# Altium PCB Smart Bike Theft Tracker.PcbDoc
Units mm, origin at the board's own origin, x right, y up, seen from the top; angles counter-clockwise.
Board outline 57.28 x 40.64 mm, 4 copper layers (Layer 1, Layer 2, Layer 3, Layer 4), stack 1.626 mm thick; 43 components, 33 nets, 240 pads, 66 vias.
Unrouted connection lines stored in the file: 1.
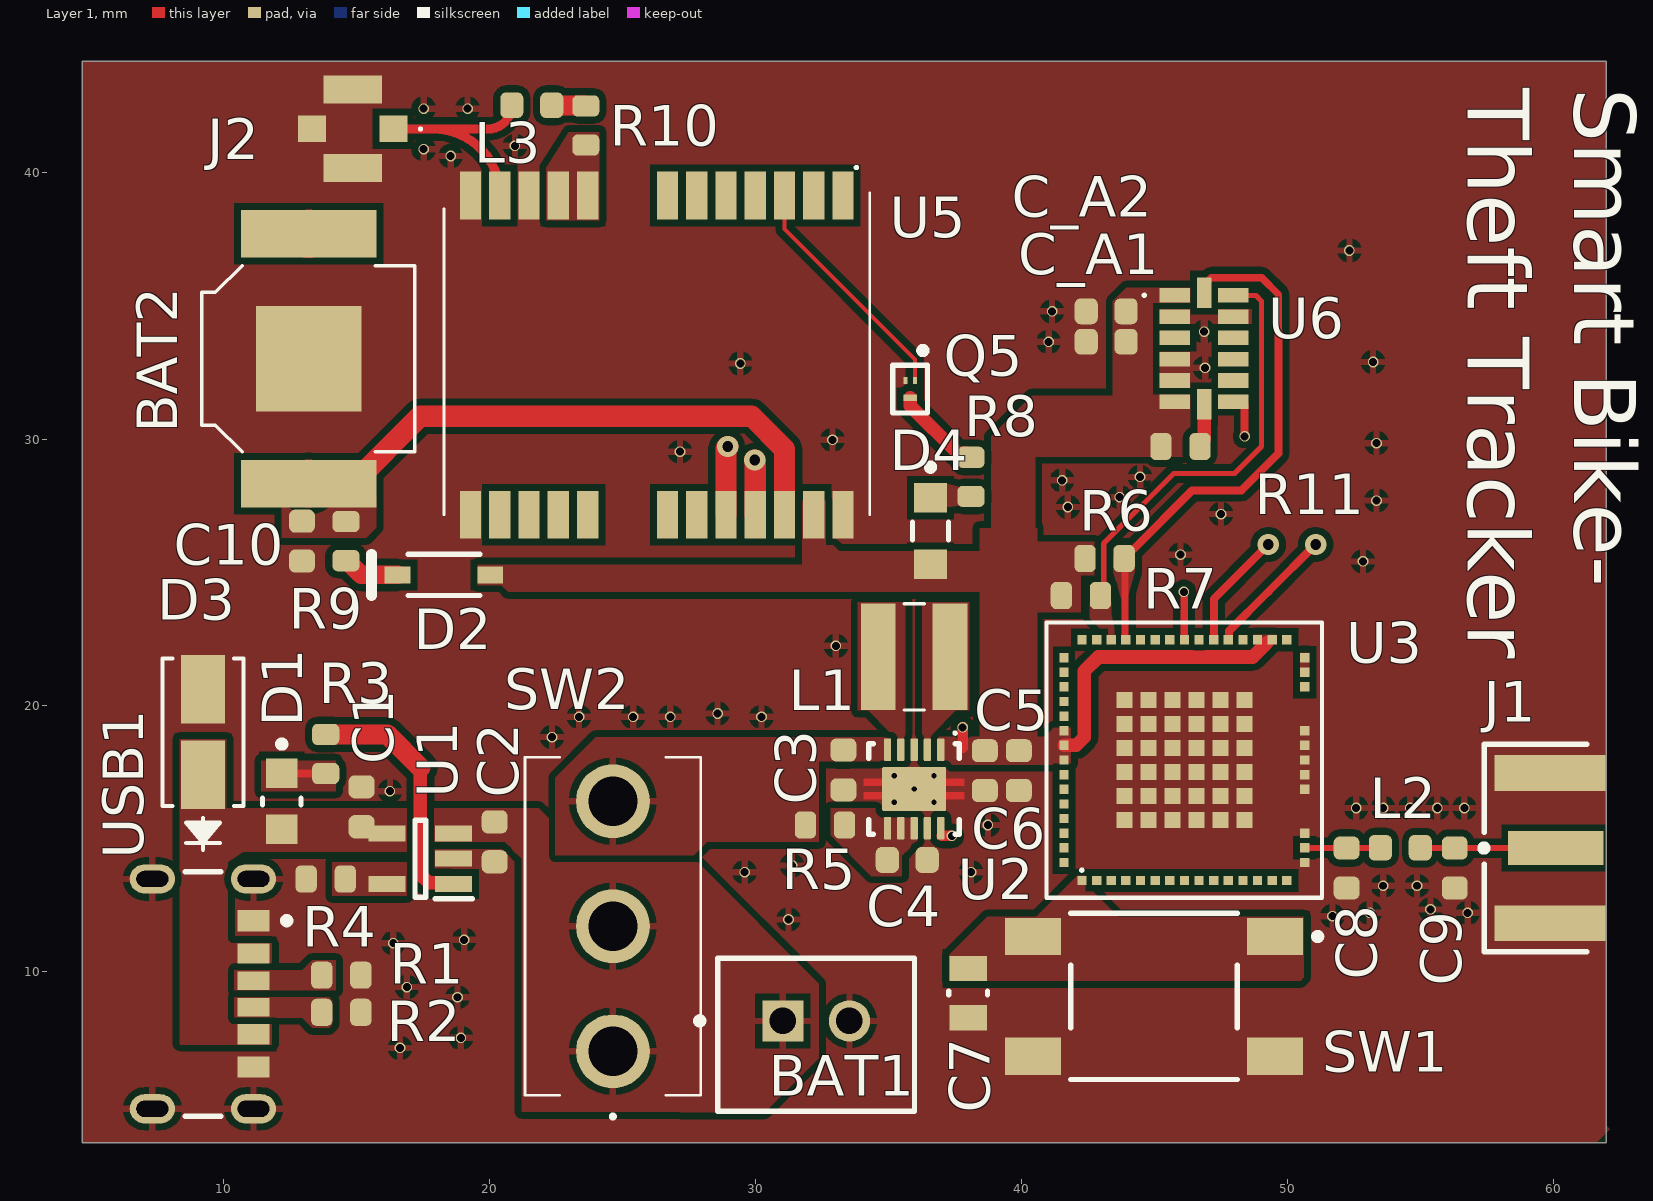
[diagram p0: Layer 1 view]
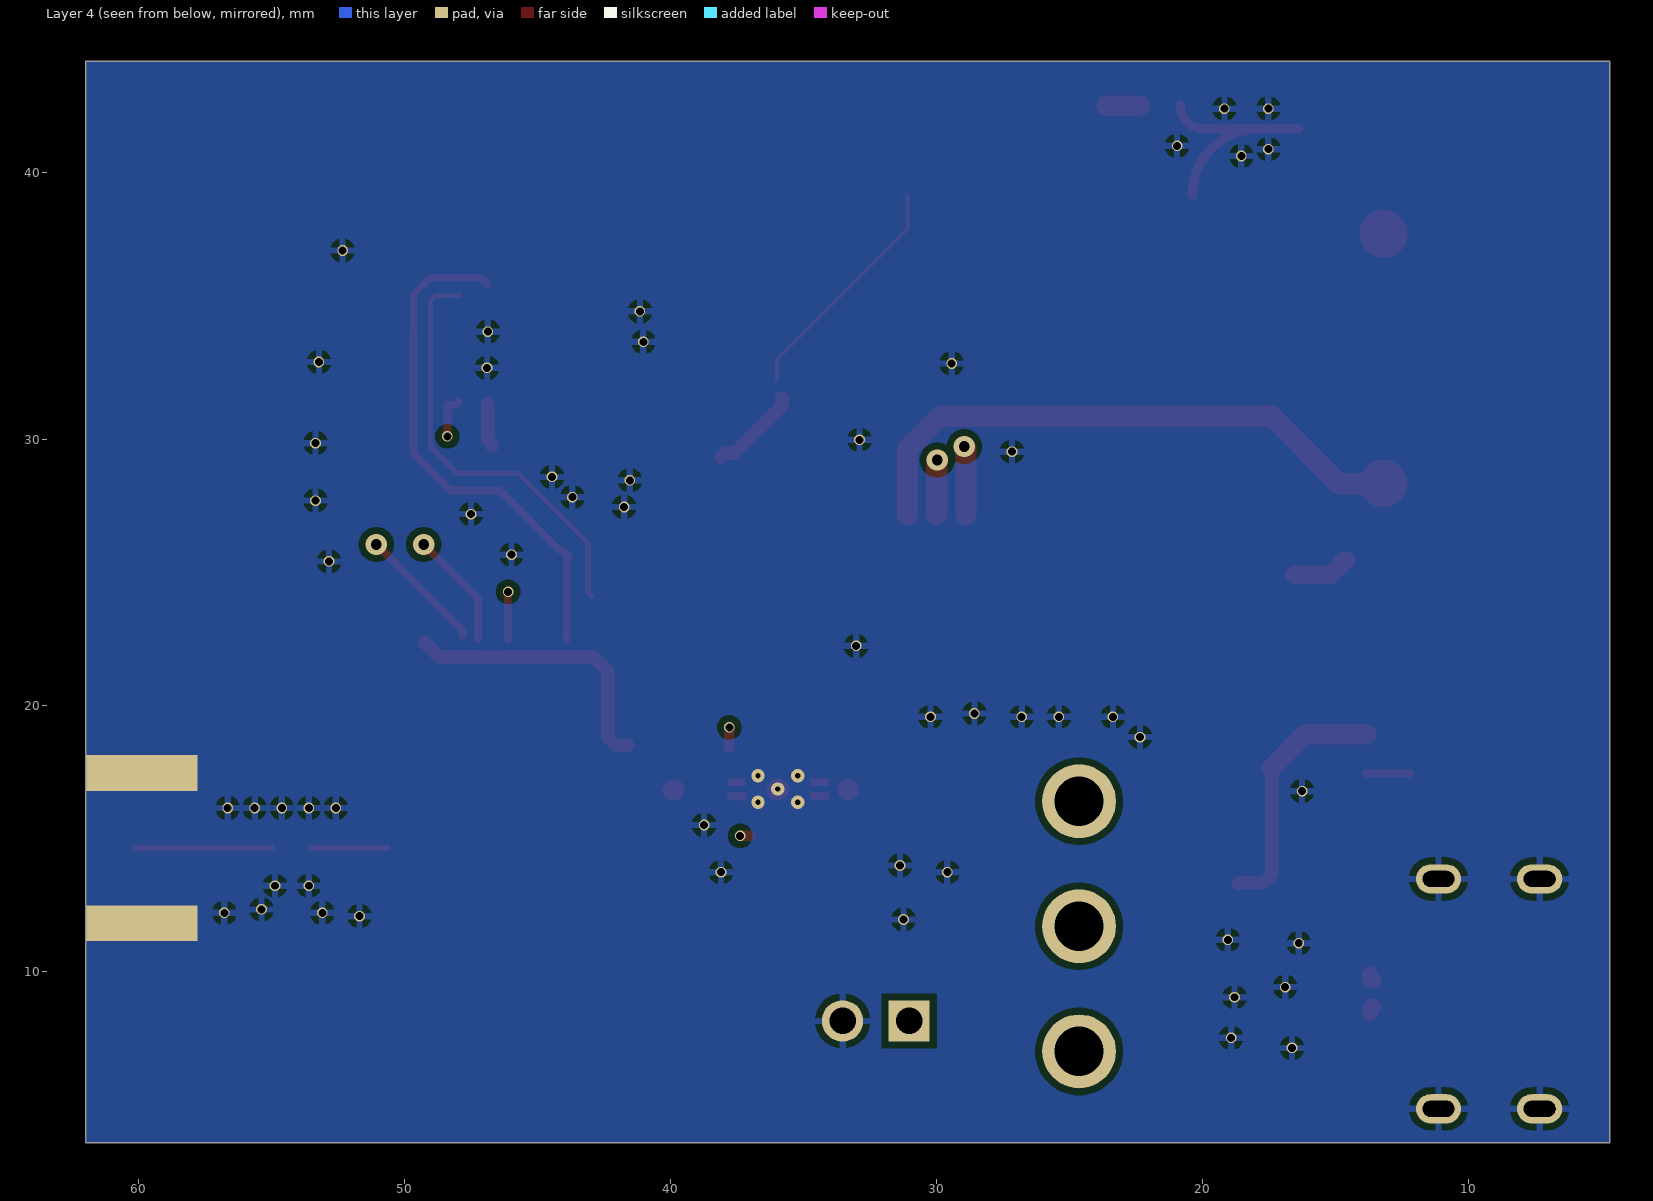
[diagram p1: Layer 4 view, seen from below]
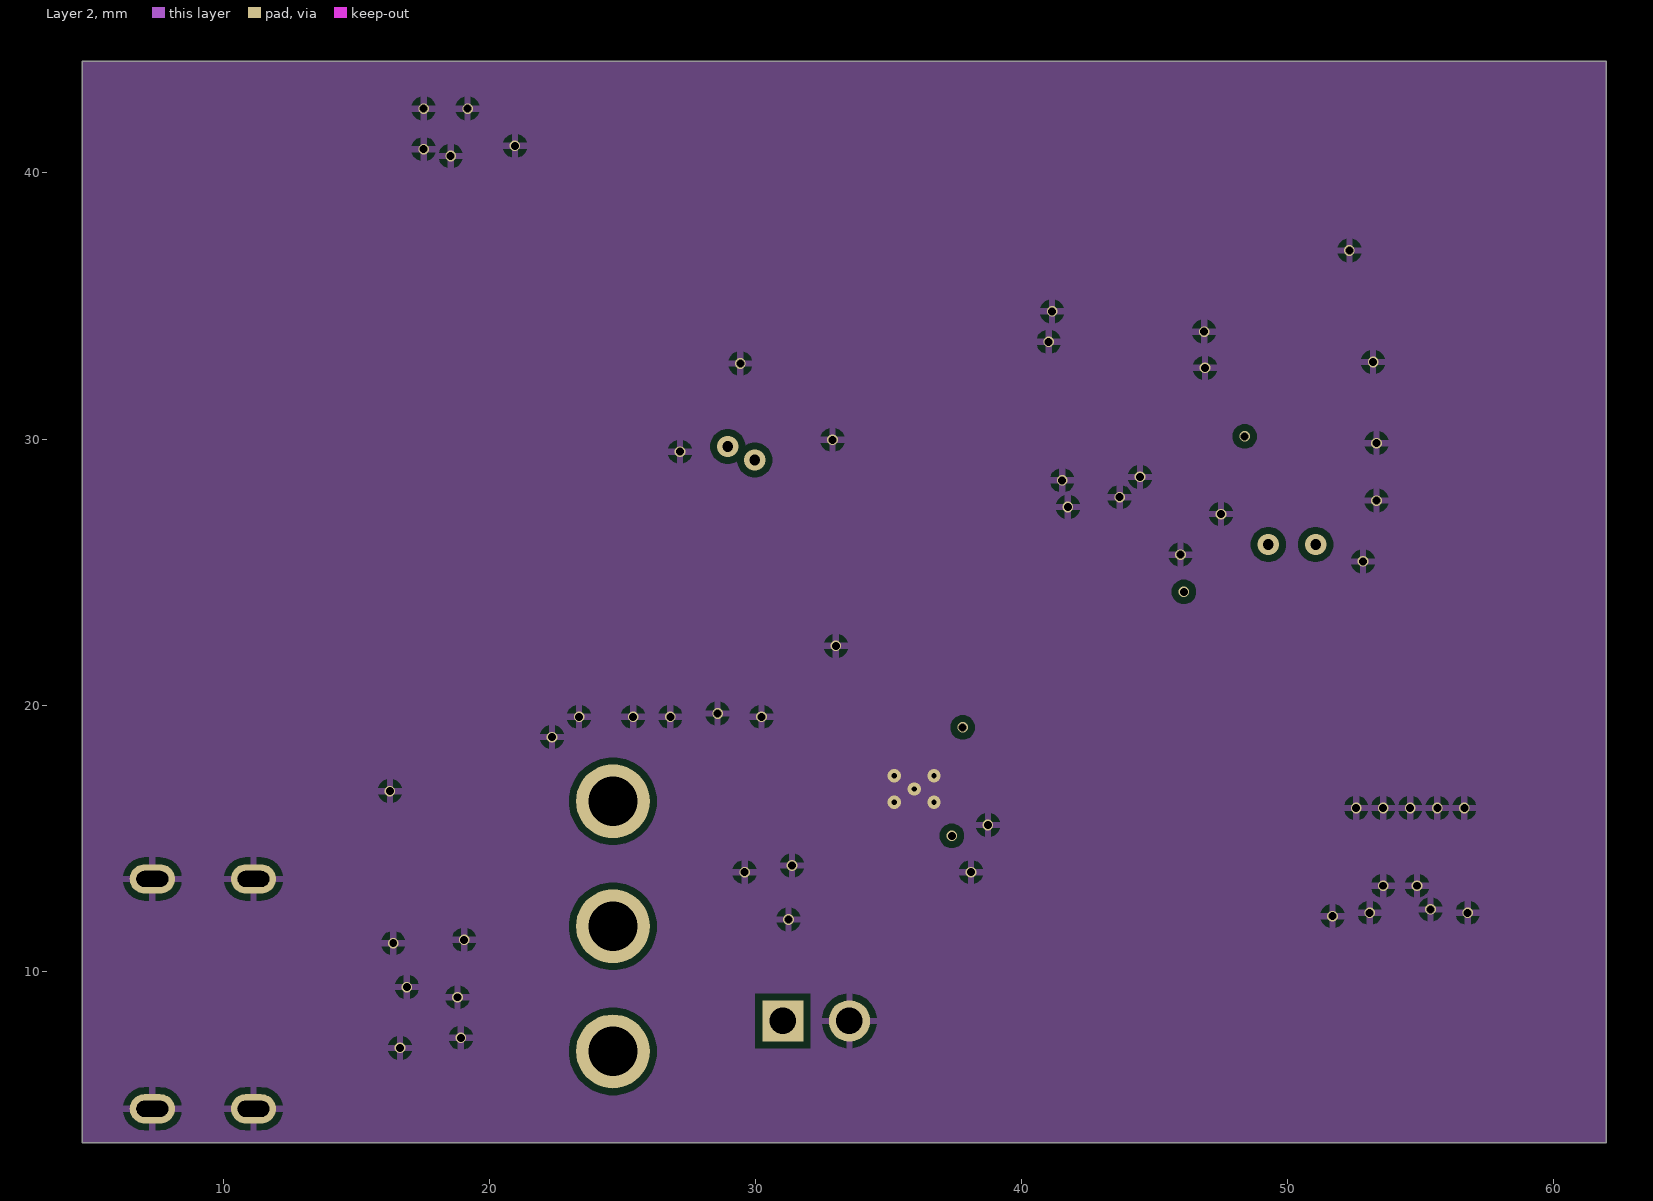
[diagram p2: Layer 2]
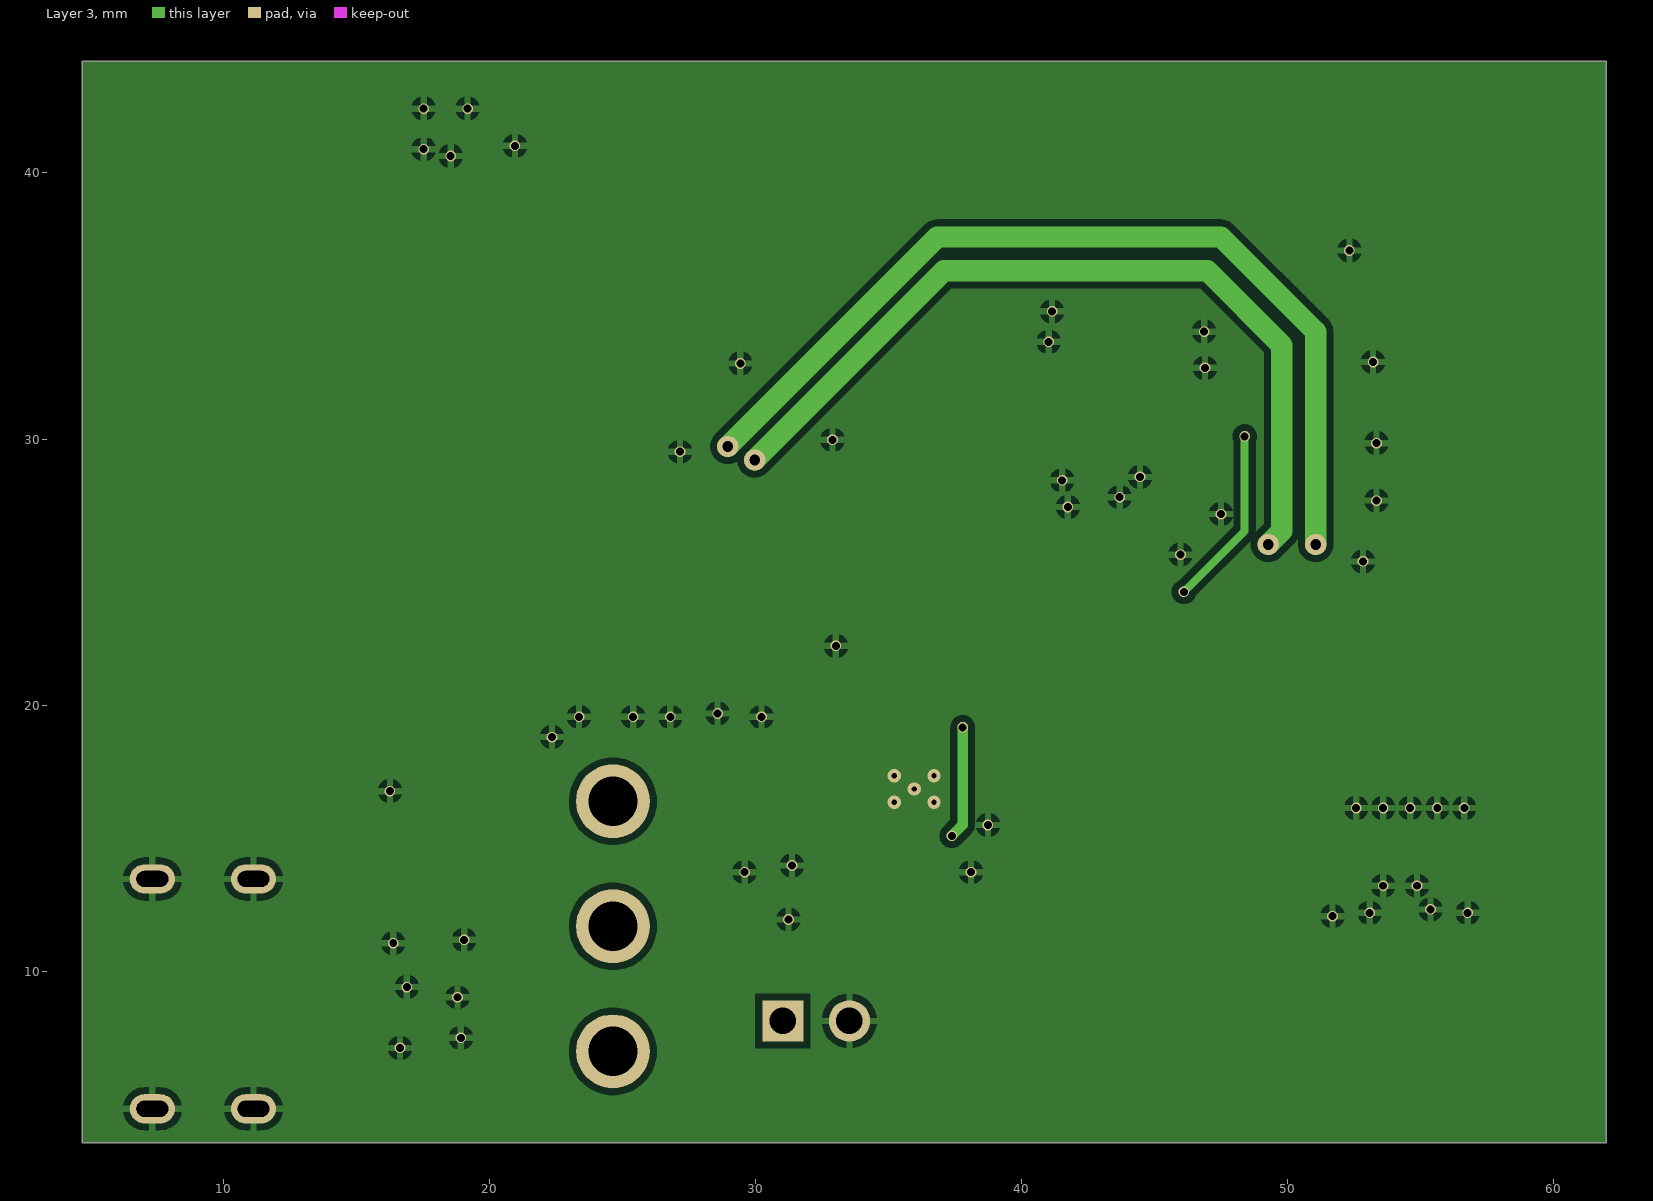
[diagram p3: Layer 3]
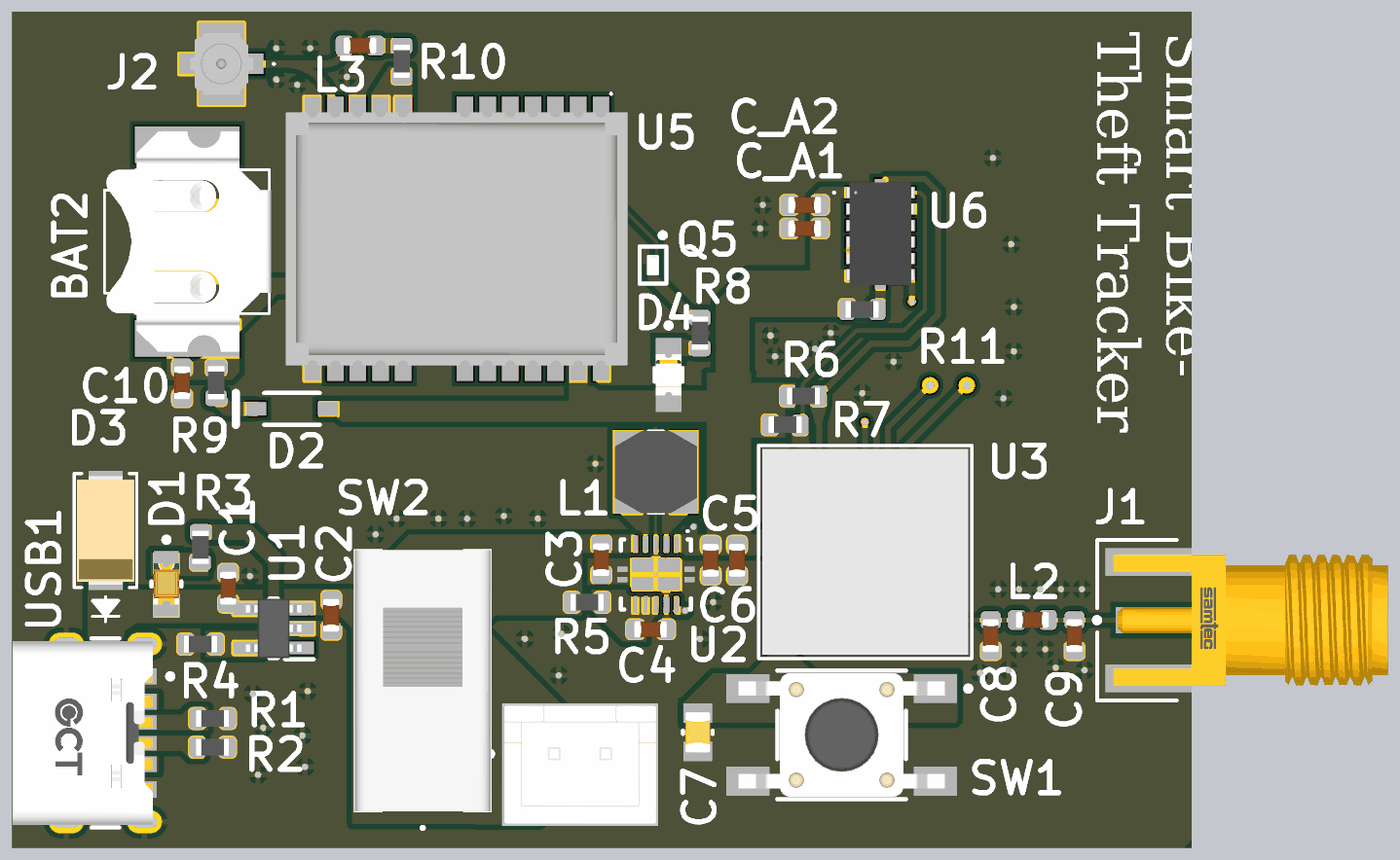
[diagram p4: 3D render of the assembled board from above, using the file's embedded part models]

## Layer stack, top to bottom
Top Solder: solder mask 0.0254, SM-001, Dk 4
Layer 1: signal copper 0.035
Dielectric 1: prepreg 0.2104, PP-017, Dk 4.4
Layer 2: signal copper 0.035
Dielectric 2: core 1.065, Core-039, Dk 4.6
Layer 3: signal copper 0.035
Dielectric 3: prepreg 0.2104, PP-017, Dk 4.4
Layer 4: signal copper 0.035
Bottom Solder: solder mask 0.0254, SM-001, Dk 4

## Board outline
4.699,3.556 61.976,3.556 61.976,44.196 4.699,44.196

## Design rules (kind name [scope] priority, off if disabled: settings)
Clearance [All] p1: gap=0.254 ignorepadtopadclearanceinfootprint=FALSE except(0.2: Arc-SMDPad Track-SMDPad SMDPad-SMDPad)
MinimumSolderMaskSliver [All] p1: minsoldermaskwidth=0.05
PolygonConnect "GND pour" [InNet('GND') vs InNet('GND')] p1: thpad.connectstyle=Relief thpad.reliefconductorwidth=0.254 thpad.reliefentries=4 thpad.polygonreliefangle="90 Angle" thpad.airgapwidth=0.254 smdpad.connectstyle=Direct smdpad.reliefconductorwidth=0.254 smdpad.reliefentries=4 smdpad.polygonreliefangle="90 Angle" smdpad.airgapwidth=0.254 via.connectstyle=Direct via.reliefconductorwidth=0.254 via.reliefentries=4 via.polygonreliefangle="90 Angle" via.airgapwidth=0.254
PolygonConnect [All] p2: thpad.connectstyle=Relief thpad.reliefconductorwidth=0.254 thpad.reliefentries=4 thpad.polygonreliefangle="90 Angle" thpad.airgapwidth=0.254 smdpad.connectstyle=Direct smdpad.reliefconductorwidth=0.254 smdpad.reliefentries=4 smdpad.polygonreliefangle="90 Angle" smdpad.airgapwidth=0.254 via.connectstyle=Direct via.reliefconductorwidth=0.254 via.reliefentries=4 via.polygonreliefangle="90 Angle" via.airgapwidth=0.254
RoutingVias [All] p1: holewidth=0.3 width=0.4 viastyle="Through Hole" minholewidth=0.3 minwidth=0.4 maxholewidth=0.3 maxwidth=0.4
SolderMaskExpansion [All] p1: expansion=0.102 istentingtop=FALSE
SupplyNets "Schematic Supply Nets_1" [InNet('GND')] p1: voltage=0.000
SupplyNets "Schematic Supply Nets" [InNet('GND')] p2: voltage=0.000
SupplyNets "Schematic Supply Nets_4" [InNet('3V3')] p3: voltage=0.000
Width "GPS RF" [InNet('NetJ2_1')] p1: maxlimit=0.348 minlimit=0.254 preferedwidth=0.348 toplayer_minwidth=0.348 midlayer2_prefwidth=0.248 bottomlayer_minwidth=0.348 impedanceprofiledriven=TRUE impedanceprofileid={65077847-5944-4495-BCBA-3C967489DBFF} impedanceprofilevalue=50.000000 minimp=50.000000 maximp=50.000000 favimp=50.000000
Width "LoRa RF" [InNetClass('LoRa RF')] p2: maxlimit=0.231 minlimit=0.231 preferedwidth=0.231 impedanceprofiledriven=TRUE impedanceprofileid={950E5AF8-2604-445B-8C1F-956C5B0C9720} impedanceprofilevalue=50.000000 minimp=50.000000 maximp=50.000000 favimp=50.000000
Width [All] p3: maxlimit=2.54 minlimit=0.15 preferedwidth=0.254 minimp=50.000000 maximp=50.000000 favimp=50.000000
29 further rules are at their usual default settings.

## Classes and differential pairs
net class "LoRa RF": "LoRa ANT" "STM ANT"
component class U_MCU: C7 C8 C9 J1 L2 L? R6 R7 SW1 U3
component class U_GyroSense: C_A1 C_A2 R11 U6
component class U_GPS: BAT2 C10 D2 D4 J2 L3 L? Q5 R8 R9 R10 U5
component class U_BatteryCharger: BAT1 C1 C2 C3 C4 C5 C6 CR? D1 D3 L1 L? R1 R2 R3 R4 R5 SW2 U1 U2 USB1

## Components (designator, comment, footprint, x,y, rotation, side; value= is the part's Value field where it differs from the comment)
BAT1 "B2B-XH-A" JST_B2B-XH-A 32.278,7.603 r0 top
BAT2 "2998" BAT_2998TR 13.208,33.02 r90 top
C1 "4u7" CAP_0603 15.193,16.176 r270 top
C2 "4u7" CAP_0603 20.193,14.859 r90 top
C3 "10u" CAP_0603 33.305,17.562 r90 top
C4 "100n" CAP_0603 35.703,14.178 r180 top
C5 "10u" CAP_0603 38.621,17.537 r90 top
C6 "10u" CAP_0603 39.899,17.537 r90 top
C7 "AC0805KKX7R5BB105" FP-AC0805-0_85-MFG 37.994,9.175 r270 top value="1 uF"
C8 "" CAP_0603 52.218,13.874 r90 top
C9 "" CAP_0603 56.282,13.874 r90 top
C10 "1u" CAP_0603 12.954,26.162 r90 top
C_A1 "0.1 uF" CAP_0603 43.18,33.655 r0 top
C_A2 "10 uF" CAP_0603 43.18,34.798 r0 top
D1 "598-8110-107F" RED_LED_0805 12.192,16.383 r270 top
D2 "STPS0540Z" STM-SOD-123-2_V 18.288,24.892 r180 top
D3 "SMAJ5.0A" SMASeries_LTF-M 9.236,18.981 r90 top
D4 "LTST-C171KGKT" FP-LTST-C171KGKT-MFG 36.576,26.543 r270 top
J1 "SMA-J-P-H-ST-EM1" FP-SMA-J-P-H-ST-EM1-MFG 66.74,14.624 r90 top
J2 "A-1JB" A1JB 14.859,41.656 r0 top
L1 "VLS4012ET-2R2M" IND_VLS4012ET-2R2M 35.962,21.814 r0 top
L2 "0R" CAP_0603 54.238,14.636 r0 top
L3 "LQG18HN27NJ00D" CAP_0603 21.59,42.545 r180 top
Q5 "CSD13381F4" FP-CSD13381F4-MFG 35.814,31.877 r180 top
R1 "5k1" RES_0603 14.429,9.848 r180 top
R2 "5k1" RES_0603 14.429,8.451 r0 top
R3 "140R" RES_0603 13.843,18.161 r270 top
R4 "1k05" RES_0603 13.843,13.462 r180 top
R5 "100R" RES_0603 32.612,15.494 r180 top
R6 "4k7" RES_0603 43.121,25.511 r180 top
R7 "4k7" RES_0603 42.232,24.114 r180 top
R8 "1k" RES_0603 38.1,28.575 r90 top
R9 "3k3" RES_0603 14.605,26.162 r270 top
R10 "22R" RES_0603 23.622,41.783 r90 top
R11 "4.7K" RES_0603 45.974,29.718 r0 top
SW1 "TL3301AF160QG" FP-TL3301AF160QG-MFG 44.979,9.048 r180 top
SW2 "500SSP1S1M2QEA" 500SSP1S1M2QEA 24.638,6.983 r90 top
U1 "MCP73831T-2ACI/OT" SOT95P270X145-5N 17.399,14.224 r180 top
U2 "TPS63001DRCR" DRC0010J_V 35.962,16.844 r270 top
U3 "STM32WL5MOCH6TR" LGA-92_10X10_STM 46.122,17.933 r90 top
U5 "NEO-6M-0-001" NEO6M0001 26.289,33.655 r90 top
U6 "ADXL345BCCZ-RL7" ADXL345BCCZRL7 46.863,33.401 r0 top
USB1 "USB4125-GF-A-0190" FP-USB4125-GF-A-0190-MFG 8.128,9.144 r270 top

## Footprints (in the part's own frame and the unit in brackets; to place one, negate y for a bottom-side part, rotate by r counter-clockwise, add the part's x,y. Pads: shape width x height; smd on the part's side, far side on the other; paste and mask are expansions set on the pad)
500SSP1S1M2QEA [mm]
  round 2.775 hole 1.85: 1(0,0) 2(4.7,0) 3(9.4,0)
  silkscreen extent -2.5,-3.3 11.05,3.3, body extent -1.65,-3.3 11.05,3.3, height 11.43
A1JB [mm]
  rect 1.05x1 smd: 1(1.525,0) 3(-1.525,0)
  rect 2.2x1.05 smd: 2(0,1.475) 4(0,-1.475)
  silkscreen extent 2.5,-0.05 2.6,0.05, body extent -1.55,-1.5 1.55,1.5, height 1.24
ADXL345BCCZRL7 [mm] "Accelerometer"
  rect 1.145x0.55 smd: 1(-1.097,2) 2(-1.097,1.2) 3(-1.097,0.4) 4(-1.097,-0.4) 5(-1.097,-1.2) 6(-1.097,-2) 8(1.098,-2) 9(1.098,-1.2) 10(1.098,-0.4) 11(1.098,0.4) 12(1.098,1.2) 13(1.098,2)
  rect 0.55x1.145 smd: 7(0,-2.098) 14(0,2.098)
  silkscreen extent -2.3,1.95 -2.2,2.05, body extent -1.63,-2.5 1.63,2.5, height 1.02
BAT_2998TR [mm]
  rect 3.96x3.96 smd paste-3: 1(0,0)
  rect 1.78x5.08 smd: 2(-4.7,0) 2(4.7,0)
  silkscreen extent -3.49,-3.98 3.49,4.02, body extent -5.36,-4.06 5.36,3.94, height 3.05
CAP_0603 [mm]
  rrect51% 0.87x0.97 smd mask+0.05: 1(-0.75,0) 2(0.75,0)
  body extent -0.8,-0.4 0.8,0.4, height 0.8
DRC0010J_V [mm] "SON, 10-Leads, Body 3x3mm, Pitch 0.5mm, Thermal Pad 2.4x1.65mm, TI Recommended"
  rrect36% 0.85x0.28 smd paste-0.025 mask+0.07: 1(-1.475,1) 2(-1.475,0.5) 3(-1.475,0) 4(-1.475,-0.5) 5(-1.475,-1) 6(1.475,-1) 7(1.475,-0.5) 8(1.475,0) 9(1.475,0.5) 10(1.475,1)
  rrect6% 1.65x2.4 smd paste-0.825 mask+0.07: 11(0,0)
  Layer 1 region: -0.392,1.2 -0.112,1.2 -0.112,1.9 -0.392,1.9
  Layer 1 region: 0.388,1.9 0.108,1.9 0.108,1.2 0.388,1.2
  Layer 1 region: 0.388,-1.2 0.108,-1.2 0.108,-1.9 0.388,-1.9
  Layer 1 region: -0.392,-1.9 -0.112,-1.9 -0.112,-1.2 -0.392,-1.2
  silkscreen extent -2.15,-1.7 1.7,1.7, body extent -1.55,-1.55 1.55,1.55, height 1
FP-AC0805-0_85-MFG [mm]
  rect 0.95x1.4 smd paste+0 mask+0: 1(-0.925,0) 2(0.925,0)
  silkscreen extent -0.08,-0.72 0.08,0.72, body extent -1.6,-1.05 1.6,1.05, height 0.25
FP-CSD13381F4-MFG [mm]
  rect 0.15x0.25 smd paste+0 mask+0: 1(-0.175,-0.325) 2(0.175,-0.325)
  rect 0.5x0.25 smd paste+0 mask+0: 3(0,0.325)
  silkscreen extent -0.65,-1.57 0.65,0.9, body extent -0.82,-1.02 0.82,1.02, height 0.25
FP-LTST-C171KGKT-MFG [mm]
  rect 1.1x1.25 smd paste+0 mask+0: 1(-1.25,0) 2(1.25,0)
  silkscreen extent -2.52,-0.67 0.33,0.67, body extent -1.9,-0.77 1.9,0.77, height 0.25
FP-SMA-J-P-H-ST-EM1-MFG [mm]
  rect 1.27x3.6 smd paste+0 mask+0: 1(0,6.66)
  rect 1.35x4.2 smd paste+0 mask+0: 2(-2.825,6.86) 3(2.825,6.86)
  rect 1.35x4.2 smd far side paste+0 mask+0: 4(-2.825,6.86) 5(2.825,6.86)
  silkscreen extent -3.9,5.5 3.9,9.48, body extent -3.6,-4.92 3.6,9.06, height 0.25
FP-TL3301AF160QG-MFG [mm]
  rect 2.1x1.4 smd paste+0 mask+0: 1(-4.55,-2.25) 2(4.55,-2.25) 3(-4.55,2.25) 4(4.55,2.25)
  silkscreen extent -6.28,-3.13 3.13,3.13, body extent -5.7,-3.22 5.7,3.22, height 0.25
FP-USB4125-GF-A-0190-MFG [mm]
  rrect100% 1.1x1.7 hole 1.2 slot 0.6 at 0 deg paste-2539.97 mask+0: 1(-4.32,3) 2(4.32,3) 3(-4.32,-0.8) 4(4.32,-0.8)
  rect 0.7x1.2 smd paste+0 mask+0: A5(-0.5,3) B5(0.5,3)
  rect 0.76x1.2 smd paste+0 mask+0: A9(1.52,3) B9(-1.52,3)
  rect 0.8x1.2 smd paste+0 mask+0: A12(2.75,3) B12(-2.75,3)
  silkscreen extent -4.59,0.43 4.59,4.38, body extent -4.97,-3.57 4.97,3.95, height 0.25
IND_VLS4012ET-2R2M [mm]
  rect 1.3x4 smd: 1(-1.35,0) 2(1.35,0)
  silkscreen extent -0.38,-2 0.38,2, body extent -2,-2 2,2, height 1.2
JST_B2B-XH-A [mm]
  rect 1.55x1.55 hole 1 paste-2539.97 mask+0: 1(-1.25,0.525)
  round 1.55 hole 1 paste-2539.97 mask+0: 2(1.25,0.525)
  silkscreen extent -4.5,-2.88 3.7,2.88, body extent -3.8,-2.98 3.8,2.98, height 0.25
LGA-92_10X10_STM [mm]
  rect 0.35x0.35 smd paste+0 mask+0: 1(-4.525,3.85) 2(-4.525,3.3) 3(-4.525,2.75) 4(-4.525,2.2) 5(-4.525,1.65) 6(-4.525,1.1) 7(-4.525,0.55) 8(-4.525,0) 9(-4.525,-0.55) 10(-4.525,-1.1) 11(-4.525,-1.65) 12(-4.525,-2.2) 13(-4.525,-2.75) 14(-4.525,-3.3) 15(-4.525,-3.85) 16(-3.85,-4.525) 17(-3.3,-4.525) 18(-2.75,-4.525) 19(-1.1,-4.525) 20(-0.55,-4.525) 21(0,-4.525) 22(0.55,-4.525) 23(1.1,-4.525) 24(2.75,-4.525) 25(3.3,-4.525) 26(3.85,-4.525) 27(4.525,-3.85) 28(4.525,-3.3) 29(4.525,-2.75) 30(4.525,-2.2) 31(4.525,-1.65) 32(4.525,-1.1) 33(4.525,-0.55) 34(4.525,0) 35(4.525,0.55) 36(4.525,1.1) 37(4.525,1.65) 38(4.525,2.2) 39(4.525,2.75) 40(4.525,3.3) 41(4.525,3.85) 42(3.85,4.525) 43(3.3,4.525) 44(2.75,4.525) 45(2.2,4.525) 46(1.65,4.525) 47(1.1,4.525) 48(0.55,4.525) 49(0,4.525) 50(-0.55,4.525) 51(-1.1,4.525) 52(-1.65,4.525) 53(-2.2,4.525) 54(-2.75,4.525) 55(-3.3,4.525) 56(-3.85,4.525)
  rect 0.6x0.6 smd paste+0 mask+0: 57(-2.25,2.25) 58(-2.25,1.35) 59(-2.25,0.45) 60(-2.25,-0.45) 61(-2.25,-1.35) 62(-2.25,-2.25) 63(-1.35,-2.25) 64(-0.45,-2.25) 65(0.45,-2.25) 66(1.35,-2.25) 67(2.25,-2.25) 68(2.25,-1.35) 69(2.25,-0.45) 70(2.25,0.45) 71(2.25,1.35) 72(2.25,2.25) 73(1.35,2.25) 74(0.45,2.25) 75(-0.45,2.25) 76(-1.35,2.25) 77(-1.35,1.35) 78(-1.35,0.45) 79(-1.35,-0.45) 80(-1.35,-1.35) 81(-0.45,-1.35) 82(0.45,-1.35) 83(1.35,-1.35) 84(1.35,-0.45) 85(1.35,0.45) 86(1.35,1.35) 87(0.45,1.35) 88(-0.45,1.35) 89(-0.45,0.45) 90(-0.45,-0.45) 91(0.45,-0.45) 92(0.45,0.45)
  silkscreen extent -5.18,-5.18 5.18,5.18, body extent -5,-5 5,5, height 1.82
NEO6M0001 [mm]
  rect 1.8x0.8 smd: 1(5.5,-7) 2(5.5,-5.9) 3(5.5,-4.8) 4(5.5,-3.7) 5(5.5,-2.6) 6(5.5,-1.5) 7(5.5,-0.4) 8(5.5,2.6) 9(5.5,3.7) 10(5.5,4.8) 11(5.5,5.9) 12(5.5,7) 13(-6.5,7) 14(-6.5,5.9) 15(-6.5,4.8) 16(-6.5,3.7) 17(-6.5,2.6) 18(-6.5,-0.4) 19(-6.5,-1.5) 20(-6.5,-2.6) 21(-6.5,-3.7) 22(-6.5,-4.8) 23(-6.5,-5.9) 24(-6.5,-7)
  silkscreen extent -6.5,-8 6.6,8, body extent -6.66,-8.3 5.64,8.3, height 2.66
RED_LED_0805 [mm]
  rect 1.1x1.2 smd paste+0 mask+0.05: 1(-1.05,0) 2(1.05,0)
  silkscreen extent -2.27,-0.72 0.13,0.72, body extent -1.7,-0.82 1.7,0.82, height 0.25
RES_0603 [mm]
  rrect50% 0.8x1.02 smd mask+0.05: 1(-0.735,0) 2(0.735,0)
  body extent -0.8,-0.4 0.8,0.4, height 0.55
SMASeries_LTF-M [mil]
  rect 101.34x65 smd paste+0 mask+0: 1(-63.17,0) 2(63.17,0)
  silkscreen extent -174,-60 109,60, body extent -104,-55 104,55, height 92
SOT95P270X145-5N [mm]
  rect 1.4x0.6 smd: 1(-1.25,0.95) 2(-1.25,0) 3(-1.25,-0.95) 4(1.25,-0.95) 5(1.25,0.95)
  silkscreen extent -1.95,-1.45 0.2,1.5, body extent -1.35,-1.45 1.35,1.45, height 1.45
STM-SOD-123-2_V [mm] "SOP, 2-Leads, Body 2.7x1.55mm"
  rect 0.97x0.65 smd: 1(-1.74,0) 2(1.74,0)
  silkscreen extent -1.35,-0.77 2.72,0.77, body extent -1.37,-0.77 1.37,0.77, height 1.45

## Part data
BAT1: Package=None, Availability=Unavailable, MF="{'manufacturer': u'JST Sales America Inc.'}", MP=B2B-XH-A, Price=None
BAT2: "BATTERY RETAINER COIN 6.8MM SMD", Case/Package=SMD/SMT, Color=Silver, Package Quantity=100, Contact Material=Bronze, Height=2.9mm, Lead Free="Lead Free", Material=Bronze, Mount="Surface Mount", Number of Batteries=1, Number of Cells=1, REACH SVHC="No SVHC", Termination=SMD/SMT
C1 C2 C3 C4 C5 C6 C8 C9: library part CAP_0603, "Capacitor SMD 0603 / Ceramic"
C7: library part CMP-03422-000426-1, "AC0805 1 uF X7R 10.00% 6.3 V", Capacitance="1 uF", Manufacturer=Yageo, Package=AC0805-0.85, Temperature="-55°C to +125°C", Temperature Characteristic=X7R, Temperature Coefficient=15%, Temperature Range High=+125°C, Temperature Range Low=-55°C, Tolerance=0.1, Voltage Rating="6.3 V", Automotive=Yes, Automotive Grade="Grade 1", Category=Cap, ComponentLink2Description=Datasheet, ComponentLink2URL=http://www.yageo.com/documents/recent/UPY-AC_NP0X7R_16V-to-630V_12.pdf, Device Class L1="Passive Components", Device Class L2=Capacitors, Device Class L3="Ceramic Capacitors", Footprint Url=http://www.yageo.com/exep/pages/download/literatures/UPY-C_GEN_24.pdf, Height=0.95mm, Ipc Land Pattern Name=CAPC200125X85, Lead Free=Yes, Manufacturer Part Number=AC0805KKX7R5BB105, Material=Ceramic, Octopart=https://octopart.com/ac0805kkx7r5bb105-yageo-78873385, RoHS=TRUE
C10: library part CAP_0603, "Ceramic Capacitor SMD 0603"
C_A1 C_A2: library part CAP_0603, "Capacitor SMD 0603"
D1: library part RED_LED_0805, "598-8110-107F 598-8110-107F, Dialight, SMD LED 0805 Package, Red Single color SOLD IN INCREMENTS OF 4000. (REEL)", Case Code (Imperial)=0805, Case Code (Metric)=2012, Color=Red, Forward Current=20mA, Forward Voltage=2.2V, Max Junction Temperature (Tj)=105°C, Max Operating Temperature=85°C, Min Operating Temperature=-30°C, Power Dissipation=60mW, Reverse Voltage=5V, Case/Package=0805, Depth=1.25mm, Dominant Wavelength=635nm, Height=800µm, Illumination Color=Red, Lead Free="Lead Free", Length=2mm, Lens Style=Clear, Luminous Intensity=40mcd, Mount="Surface Mount", NexarPartId=868569, Number of Elements=1, Number of LEDs=1, Number of Pins=2, Radiation Hardening=No, REACH SVHC="No SVHC", RoHS=Compliant, Schedule B="8541402000, 8541402000|8541402000, 8541402000|8541402000|8541402000, 8541402000|8541402000|8541402000|8541402000", Test Current=20mA, Viewing Angle=140°, Wavelength=635nm, Width=1.25mm
D2: library part CMP-2000-07170-1, "Schottky Rectifier, 0.5 A, 40 V, 2-Pin SOP (SOD-123), RoHS, Tape and Reel", Diode Case Style=SOD-123, Forward Current If(AV)=500mA, Forward Surge Current Ifsm Max=5.5A, Forward Voltage VF Max=500mV, Manufacturer=STMicroelectronics, Operating Temperature Max=150°C, Package Description="2-Pin Small Outline Diode, Body 2.7 x 1.55 mm", Package Reference=SOD-123-2, Repetitive Reverse Voltage Vrrm Max=40V, Datasheet URL=http://www.st.com/content/ccc/resource/technical/document/datasheet/group1/0f/03/9b/7c/50/58/48/d7/CD00001852/files/CD00001852.pdf/jcr:content/translations/en.CD00001852.pdf, Datasheet Version=01/2002, Diode Configuration=Single, Diode Type=Schottky, Manufacturer URL=http://www.st.com/, Mounting Technology=SurfaceMount, No. of Pins=2Pins, Packaging=CutTape, Product Range=-, SVHC=NoSVHC(15-Jun-2015)
D3: "ESD Protection Diode", Manufacturer_Name="Littelfuse Inc", Copyright="Copyright (C) 2025 Ultra Librarian. All rights reserved.", Manufacturer_Part_Number=SMAJ5.0A
D4: library part CMP-22017-000037-1, "LED GREEN CLEAR SMD", Case Code (Imperial)=0805, Case Code (Metric)=2012, Color=Green, Forward Current=30mA, Forward Voltage=2.4V, Lens Color=Colorless, Max Operating Temperature=85°C, Min Operating Temperature=-55°C, Package Quantity=1, Power Dissipation=75mW, Reverse Voltage=5V, Test Current=20mA, Case/Package=0805, Depth=1.25mm, Dominant Wavelength=571nm, Height=0.8mm, Illumination Color=Green, Lead Free="Lead Free", Length=2mm, Lens Style=Rectangular, Lens Transparency=Clear, Luminous Intensity=35mcd, Mount="Surface Mount", Number of Elements=1, Number of LEDs=1, Number of Pins=2, Packaging="Tape and Reel", Power Rating=75mW, Radiation Hardening=No, Viewing Angle=130°, Wavelength=574nm, Width=1.25mm
J1: library part "LoRa antenna connector", "CONN SMA JACK STR 50OHM EDGE MNT / Use the ANT-SS900", Case/Package=SMA, Dielectric Material=PTFE, Housing Color=Gold, Max Frequency=6GHz, Max Operating Temperature=125°C, Min Operating Temperature=-65°C, Package Quantity=1, Voltage Rating=335V, Body Material=Brass, Body Plating=Gold, Center Contact Plating=Gold, Connector Type=SMA, Contact Material=Copper, Contact Plating=Gold, Depth=13.33mm, Fastening Type=Threaded, Impedance=50R, Insulation Material=Polytetrafluoroethylene, Length=6.35mm, Mount=Edge, Orientation=Straight, Packaging=Tray, Radiation Hardening=No, RoHS Compliant=Yes, Series=SMA, Termination=Solder
J2: "U.FL (UMCC), AMC Connector Jack, Male Pin 50 Ohms Surface Mount Solder", Manufacturer_Name="Amphenol RF", Mouser Part Number=523-A-1JB, Arrow Part Number=A-1JB, Arrow Price/Stock=https://www.arrow.com/en/products/a-1jb/amphenol-rf?utm_currency=USD&region=europe, Datasheet Link=https://s3-us-west-2.amazonaws.com/catsy.582/ca-1jb.pdf, Geometry.Height=1.35mm, Manufacturer_Part_Number=A-1JB, Mouser Price/Stock=https://www.mouser.co.uk/ProductDetail/Amphenol-RF/A-1JB?qs=ncxkyCpAYDBidtvTkuzl1Q%3D%3D
L1: "INDUCTOR, 2.2UH, 2.2A, 20%, SMD; Product Range:TDK - VLS-E Series; Inductance:2.2ÂµH; Inductance Tolerance:Â± 20%; Inductor Construction:Shielded; DC Resistance Max:0.081ohm; RMS Current (Irms):2.2A; Saturation Current (Isat):1.9A; Case Dimensions:4mm x 4mm x 1.2mm; SVHC:No SVHC (20-Jun-2013)", Package="NON STANDARD-2 TDK", Availability="In Stock", Check_prices=https://www.snapeda.com/parts/VLS4012ET-2R2M/TDK/view-part/?ref=eda, MF=TDK, MP=VLS4012ET-2R2M, Price=None, Purchase-URL=https://pricing.snapeda.com/search/part/VLS4012ET-2R2M/?ref=eda, SnapEDA_Link=https://www.snapeda.com/parts/VLS4012ET-2R2M/TDK/view-part/?ref=snap
L2: library part Inductor, "Not necessary. Place 0 ohm resistor", Package=None, Availability=Unavailable, MP=LQG18HN27NJ00D, Price=None
L3: "Ind RF Chip Multi-Layer 27nH 5% 100MHz 12Q-Factor Air 300mA 0603 Paper T/R", Package=None, Availability=Unavailable, MP=LQG18HN27NJ00D, Price=None
Q5: library part CMP-04962-000059-1, "MOSFET N-CH 12V 2.1A 3PICOSTAR", Case/Package=QFN, Continuous Drain Current (ID)=2.1A, Drain to Source Breakdown Voltage=12V, Drain to Source Resistance=180mR, Gate to Source Voltage (Vgs)=8V, Input Capacitance=200pF, Max Operating Temperature=150°C, Max Power Dissipation=500mW, Min Operating Temperature=-55°C, Package Quantity=3000, Drain to Source Voltage (Vdss)=12V, Element Configuration=Single, Fall Time=3.8ns, Lead Free="Lead Free", Mount="Surface Mount", Number of Channels=1, Number of Elements=1, Number of Pins=3, Packaging="Tape and Reel", Power Dissipation=500mW, Rds On Max=180mR, Rise Time=1.5ns, RoHS Compliant=Yes, Turn-Off Delay Time=11ns, Turn-On Delay Time=3.7ns
R1 R2 R3 R4 R5 R6 R7 R8 R9 R10 R11: library part RES_0603, "Resistor SMD 0603"
SW1: library part CMP-17879-000012-1, "SWITCH TACTILE SPST-NO 0.05A 12V", Contact Resistance=100mR, Current Rating=50mA, Insulation Resistance=100MR, Max Operating Temperature=70°C, Max Voltage Rating (DC)=50V, Min Operating Temperature=-20°C, Operating Force=160gf, Package Quantity=1000, Voltage Rating (DC)=12V, Actuator Length=1.4mm, Actuator Material=Nylon, Actuator Type=Standard, Contact Material=Silver, Contact Plating=Silver, Electrical Life=100000Cycles, Illumination Type=Non-Illuminated, Lead Free="Lead Free", Mechanical Life=100000Cycles, Mount="Surface Mount", Orientation=Straight, Packaging="Tape and Reel", REACH SVHC="No SVHC", RoHS Compliant=Yes, Series=TL3301, Switch Function=Off-Mom, Switch Travel=0.25mm, Termination="Gull Wing", Throw Configuration=SPST, Voltage Rating=50V
SW2: "SLIDE, 5A, 120VAC/28VDC SPDT, On-On Through Hole", Manufacturer_Name=E-Switch, Mouser Part Number=612-500-A121, Datasheet Link=https://configured-product-images.s3.amazonaws.com/2D/specs/500SSP1S1M2QEA.pdf, Geometry.Height=11.43mm, Manufacturer_Part_Number=500SSP1S1M2QEA, Mouser Price/Stock=https://www.mouser.co.uk/ProductDetail/E-Switch/500SSP1S1M2QEA?qs=rR7wk9eDIwofjM3j2mZRnA%3D%3D
U1: "Li-Ion Charge Controller 4.2V SOT23-5", Manufacturer_Name=Microchip, Mouser Part Number=579-MCP73831T-2ACIOT, Datasheet Link=http://ww1.microchip.com/downloads/en/DeviceDoc/20001984g.pdf, Geometry.Height=1.45mm, Manufacturer_Part_Number=MCP73831T-2ACI/OT, Mouser Price/Stock=https://www.mouser.co.uk/ProductDetail/Microchip-Technology/MCP73831T-2ACI-OT?qs=yUQqVecv4qvbBQBGbHx0Mw%3D%3D
U2: library part CMP-0345-00006-2, "Buck-Boost Voltage Converter with 1.8 to 5.5 V Input and 3.3 V Output, -40 to 85 degC, 10-Pin SON (DRC), Green (RoHS & no Sb/Br)", Dynamic Voltage Scaling=TRUE, Manufacturer="Texas Instruments", Switching Frequency(Max)(kHz)=1500, ComponentLink1Description=Datasheet, ComponentLink1URL=http://www.ti.com/general/docs/lit/getliterature.tsp?genericPartNumber=TPS63001&fileType=pdf, ComponentLink2Description="Package Specification", ComponentLink2URL=http://www.ti.com/litv/pdf/mpds117k, DatasheetVersion=SLVS520B, Eco-Plan="Green (RoHS & no Sb/Br)", Iout(Max)(A)=1.2, Iq(Typ)(mA)=0.03, Mounting Technology="Surface Mount", PackageDescription="10-Pin Plastic Small Outline No-Lead, 3 x 3 x 1 mm Body, 0.5 mm Pitch, Exposed Pad", PackageReference=DRC0010J, PackageVersion="revL, Sep-2011", PartNumber=TPS63001DRCR, Preset Vout(V)=3.3, Regulated Outputs(#)=1, SubFamily="Buck-Boost Regulator", Synchronous Rectification=TRUE, Topology=Buck-Boost, Vin(Max)(V)=5.5, Vin(Min)(V)=1.8, Vout(Max)(V)=3.3, Vout(Min)(V)=3.3
U3: "Multiprotocol LPWAN dual-core module 32-bit Arm Cortex-M4/M0+ LoRa,(G)FSK, (G)MSK, BPSK", Manufacturer_Name=STMicroelectronics, Copyright="Copyright (C) 2026 Ultra Librarian. All rights reserved.", Datasheet=https://www.st.com/resource/en/datasheet/stm32wl5moc.pdf, Manufacturer_Part_Number=STM32WL5MOCH6TR, RefDes=RefDes, Type=Type
U5: "GPS Module", Manufacturer_Name=u-blox, Datasheet Link=https://www.u-blox.com/sites/default/files/products/documents/NEO-6_DataSheet_%28GPS.G6-HW-09005%29.pdf, Geometry.Height=2.6mm, Manufacturer_Part_Number=NEO-6M-0-001
U6: "ADXL345BCCZ-RL7 Analog Devices, 3-Axis Accelerometer, I2C, SPI, 14-Pin LGA 0.3 V to +3.9 V 40C to +105C", Manufacturer_Name="Analog Devices", Mouser Part Number=584-ADXL345BCCZ-R7, Arrow Part Number=ADXL345BCCZ-RL7, Arrow Price/Stock=https://www.arrow.com/en/products/adxl345bccz-rl7/analog-devices?utm_currency=USD&region=nac, Datasheet Link=https://www.analog.com/media/en/technical-documentation/data-sheets/adxl345.pdf, Geometry.Height=1mm, Manufacturer_Part_Number=ADXL345BCCZ-RL7, Mouser Price/Stock=https://www.mouser.co.uk/ProductDetail/Analog-Devices/ADXL345BCCZ-RL7?qs=WIvQP4zGaninp9Gc%252BCsJzQ%3D%3D
USB1: library part "USB type-C", "CONN RCPT TYPE C 6P SMD RA"

## Via types
v1: diameter 0.4, hole 0.3, Layer 1 to Layer 4, tented both sides, 55 vias
v2: diameter 0.5, hole 0.2, Layer 1 to Layer 4, 5 vias
v3: diameter 0.8, hole 0.4, Layer 1 to Layer 4, 4 vias
v4: diameter 0.4, hole 0.3, Layer 1 to Layer 4, 2 vias

## Nets (pads, with @x,y where several pads share a name; then routed paths per layer and width w, separated by ;. In a path a pad name is that pad's centre, name@x,y a point inside that pad or via, vN(x,y) a via of type N, cw(c..) or ccw(c..) an arc to the next point about the centre after c; other vN are vias at no path point)
3V3: C5.2 C6.2 C_A1.2 C_A2.2 D2.1 D4.2 R6.2 R7.2 R11.1 U2.1 U2.10 U3.28 U3.29 U3.47 U3.48 U3.49 U5.23 U6.1 U6.6 | length 16.1
  Layer 1 w0.4: U2.10@37.002,15.085 v1(37.377,15.085) ; 37.787,18.399 v1(37.787,19.161)
  Layer 1 w0.508: U3.48@41.597,18.488 42.061,18.488 42.359,18.786 42.359,21.277 42.888,21.807 46.393,21.807 46.399,21.8 46.944,21.8 46.95,21.807 48.687,21.807 49.217,22.336
  Layer 3 w0.4: v1(37.377,15.085) 37.787,15.495 v1(37.787,19.161)
+5V: C1.2 D1.2 D3.1 U1.4 USB1.A9 USB1.B9
ACCEL_INT: U3.34 U6.8 | length 10.3
  Layer 1 w0.28: v4(46.101,24.257) 46.111,24.247 46.111,22.469 U3.34
  Layer 1 w0.3: U6.8 48.086,31.276 48.387,31.276 v4(48.387,30.099)
  Layer 3 w0.3: v4(46.101,24.257) 48.387,26.543 v4(48.387,30.099)
CC1: R1.2 USB1.A5 | length 0.2
  Layer 1 w0.635: R1.2@13.6,9.644 13.694,9.738 R1.2
CC2: R2.1 USB1.B5 | length 0.2
  Layer 1 w0.635: R2.1@13.611,8.644 13.694,8.561 R2.1
GND: BAT1.2 BAT2.1 C1.1 C2.1 C3.1 C4.1 C5.1 C6.1 C7.2 C8.1 C9.1 C10.1 C_A1.1 C_A2.1 D3.2 J1.2 J1.3 J1.4 J1.5 J2.2 J2.3 J2.4 Q5.2 R1.1 R2.2 R4.2 SW1.3 SW1.4 U1.2 U2.3 U2.9 U2.11 U3.16 U3.18 U3.19 U3.20 U3.21 U3.22 U3.23 U3.57 U3.58 U3.59 U3.60 U3.61 U3.62 U3.63 U3.64 U3.65 U3.66 U3.67 U3.68 U3.69 U3.70 U3.71 U3.72 U3.73 U3.74 U3.75 U3.76 U3.77 U3.78 U3.79 U3.80 U3.81 U3.82 U3.83 U3.84 U3.85 U3.86 U3.87 U3.88 U3.89 U3.90 U3.91 U3.92 U5.10 U5.12 U5.13 U5.24 U6.2 U6.4 U6.5 U6.12 USB1.1 USB1.2 USB1.3 USB1.4 USB1.A12 USB1.B12 | length 0.1
  Layer 1 w0.8: C3.1 C3.1@33.321,16.828 ; U2.11@35.946,16.828 v2(35.962,16.844) U2.11@35.99,16.816 ; C6.1@39.87,16.816 C6.1
  other v1: 16.637,7.112 18.923,7.493 18.796,9.017 16.891,9.398 16.383,11.049 19.05,11.176 31.242,11.938 51.689,12.065 53.086,12.192 56.769,12.192 55.372,12.319 53.594,13.208 54.864,13.208 29.591,13.716 38.1,13.716 31.369,13.97 38.735,15.494 52.578,16.129 53.594,16.129 54.61,16.129 55.626,16.129 56.642,16.129 16.256,16.764 22.352,18.796 23.368,19.558 25.4,19.558 26.797,19.558 30.226,19.558 28.575,19.685 33.02,22.225 52.832,25.4 45.974,25.654 47.498,27.178 41.741,27.445 53.34,27.686 43.688,27.813 41.529,28.448 44.45,28.575 27.161,29.522 53.34,29.845 32.893,29.972 46.896,32.675 29.429,32.836 53.213,32.893 41.021,33.655 46.863,34.036 41.148,34.798 52.324,37.084 18.542,40.64 17.526,40.894 20.955,41.021 17.526,42.418 19.177,42.418
  other v2: 35.212,16.344 36.712,16.344 35.212,17.344 36.712,17.344
GSCL: U5.19
GSDA: U5.18
I2C_SCL: R6.1 U3.38 U6.14 | length 19.7
  Layer 1 w0.279: R6.1 43.889,25.478 43.889,22.491 U3.38 ; U6.14@46.863,35.796 47.135,36.068 49.022,36.068 49.657,35.433 49.657,34.046
  Layer 1 w0.3: R6.1 43.856,25.594 44.102,25.84 44.185,25.84 46.411,28.067 48.26,28.067 49.657,29.464 49.657,34.046
I2C_SDA: R7.1 U3.39 U6.13 | length 16.1
  Layer 1 w0.2: R7.1 43.086,24.233 43.086,26.068 45.72,28.702 48.006,28.702 49.022,29.718 49.022,35.179 48.808,35.393 47.969,35.393 U6.13
"LoRa ANT": C9.2 J1.1 L2.2 | length 5.1
  Layer 1 w0.231: L2.2 54.994,14.63 56.276,14.63 C9.2 J1.1
NetD1_1: D1.1 R3.2 | length 1.7
  Layer 1 w0.305: D1.1 12.199,17.426 R3.2
NetD2_2: D2.2 R9.2 | length 2.2
  Layer 1 w0.7: R9.2 14.715,25.427 14.765,25.377 14.765,25.302 15.175,24.892 D2.2
NetD4_1: D4.1 R8.1
NetJ2_1: J2.1 L3.2 U5.11 | length 8.9
  Layer 1 w0.348: J2.1 17.888,41.656 ; U5.11 ccw(c17.888,39.155) 17.888,41.656 ; L3.2 cw(c19.951,42.545) 19.951,41.656 17.888,41.656
NetL1_1: L1.1 U2.4
NetL1_2: L1.2 U2.2
NetL3_1: L3.1 R10.2 | length 1.3
  Layer 1 w0.75: L3.1 23.595,42.545 R10.2
NetQ5_3: Q5.3 R8.2 | length 3.4
  Layer 1 w0.5: Q5.3 35.814,31.242 37.596,29.46 37.95,29.46 R8.2
NetR10_1: R10.1 U5.8 U5.9
NetR11_2: R11.2 U6.7 | length 1.6
  Layer 1 w0.5: R11.2 46.709,29.828 46.863,29.982 U6.7
PPS: Q5.1 U5.3 | length 9
  Layer 1 w0.15: U5.3 31.089,37.891 35.989,32.991 Q5.1
PROG: R4.1 U1.5
RX: U3.31 U5.20 | length 42.2
  Layer 1 w0.3: U3.31@47.797,22.606 47.797,22.778 49.276,24.258 v3(51.054,26.035)
  Layer 1 w0.8: U5.20 28.889,29.651 v3(28.956,29.718)
  Layer 3 w0.8: v3(28.956,29.718) 36.83,37.592 47.498,37.592 51.054,34.036 v3(51.054,26.035)
SMPS: C3.2 R5.2 SW2.3 U2.5
STAT: R3.1 U1.1 | length 9.5
  Layer 1 w0.508: 17.399,17.653 17.399,13.633 17.712,13.32 18.603,13.32 U1.1
  Layer 1 w0.762: R3.1 16.156,18.896 17.399,17.653
"STM ANT": C8.2 L2.1 U3.17 | length 2.9
  Layer 1 w0.231: U3.17@50.647,14.638 50.654,14.631 52.211,14.631 C8.2 52.224,14.63 53.482,14.63 L2.1
"STM NRST": C7.1 SW1.1 SW1.2 U3.1
TX: U3.32 U5.21 | length 38.1
  Layer 1 w0.3: U3.32@47.226,22.479 47.226,23.985 v3(49.276,26.035)
  Layer 1 w0.8: v3(29.972,29.21) 29.989,29.193 U5.21
  Layer 3 w0.8: v3(29.972,29.21) 37.084,36.322 46.99,36.322 49.784,33.528 49.784,26.543 v3(49.276,26.035)
V_BCKP: BAT2.2 C10.2 R9.1 U5.22 | length 21.9
  Layer 1 w0.8: BAT2.2@13.208,28.32 14.858,28.32 17.399,30.861 29.845,30.861 31.089,29.617 U5.22
  Layer 1 w1.8: BAT2.2@13.198,28.33 BAT2.2@13.208,28.32 ; BAT2.2@13.198,37.71 BAT2.2@13.208,37.72
VBAT: BAT1.1 C2.2 SW2.1 SW2.2 U1.3
VINA/EN/PS/SYNC: C4.2 R5.1 U2.6 U2.7 U2.8
VR_PA: U3.25 U3.26
pads on no net: U3.2 U3.3 U3.4 U3.5 U3.6 U3.7 U3.8 U3.9 U3.10 U3.11 U3.12 U3.13 U3.14 U3.15 U3.24 U3.27 U3.30 U3.33 U3.35 U3.36 U3.37 U3.40 U3.41 U3.42 U3.43 U3.44 U3.45 U3.46 U3.50 U3.51 U3.52 U3.53 U3.54 U3.55 U3.56 U5.1 U5.2 U5.4 U5.5 U5.6 U5.7 U5.14 U5.15 U5.16 U5.17 U6.3 U6.9 U6.10 U6.11

## Polygon pours and split planes (outlines as drawn)
NetL1_2 on Layer 1 "NONET_L-01_P-001" (solid, pour order 61): 36.263,17.891 36.263,23.86 38.041,23.86 38.041,19.796 37.533,19.796 36.638,18.902 36.638,17.893
3V3 on Layer 1 "Layer 1-3V3" (solid, pour order 86): 42.232,24.876 42.824,24.876 42.824,26.146 40.581,26.146 40.581,26.654 40.513,26.654 40.513,29.337 46.355,29.337 46.355,35.687 43.942,35.687 43.434,35.179 43.434,31.623 40.386,31.623 38.862,30.099 38.862,26.654 38.422,26.654 38.422,25.781 33.147,25.781 32.639,26.289 32.639,27.686 31.75,27.686 31.75,25.273 19.558,25.273 19.558,24.511 20.447,24.511 20.701,24.257 38.422,24.257 38.422,18.807 36.75,18.807 36.75,17.764 41.851,17.764 41.851,19.288 41.343,19.288 40.861,18.807 40.581,18.807 40.581,23.479 42.232,23.479
GND on Layer 1 "GND pour" (solid, pour order 87): 4.699,44.196 4.699,3.556 61.595,3.556 62.103,4.064 61.976,4.191 61.976,44.196
NetD1_1 on Layer 1 "NONET_L-01_P-001" (solid, pour order 63): 14.224,17.907 14.224,16.764 11.43,16.764 11.43,17.907
3V3 on Layer 1 "NONET_L-01_P-001" (solid, pour order 62): 48.678,22.644 49.61,22.644 49.61,22.285 48.683,22.285
VR_PA on Layer 1 "NONET_L-01_P-001" (solid, pour order 65): 50.472,21.963 50.474,21.961 50.821,21.961 50.821,21.062 50.472,21.062
CC2 on Layer 1 "NONET_L-01_P-001" (solid, pour order 58): 10.414,9.017 13.97,9.017 14.097,8.89 14.097,8.001 13.97,7.874 13.335,7.874 12.954,8.255 10.414,8.255
NetL1_1 on Layer 1 "NONET_L-01_P-001" (solid, pour order 60): 35.628,17.891 35.628,23.86 33.85,23.86 33.85,19.796 34.231,19.796 35.247,18.78 35.247,17.891
VINA/EN/PS/SYNC on Layer 1 "NONET_L-01_P-001" (solid, pour order 56): 32.834,16.113 36.136,16.113 36.136,14.843 36.009,14.843 35.501,14.335 35.501,13.573 34.358,13.573 32.834,15.097
I2C_SDA on Layer 1 "NONET_L-01_P-001" (solid, pour order 66): 43.196,22.285 43.551,22.285 43.551,22.63 43.365,23.421 43.365,23.86 42.566,23.86 42.566,23.26 43.196,22.63
PROG on Layer 1 "NONET_L-01_P-001" (solid, pour order 64): 14.097,14.097 14.097,12.827 16.891,12.827 16.891,14.097
SMPS on Layer 1 "Layer 1-SMPS" (solid, pour order 68): 22.479,17.272 22.479,14.351 27.686,14.351 28.194,14.859 32.385,14.859 32.385,17.892 35.113,17.892 35.113,18.792 23.999,18.792
"STM NRST" on Layer 1 "Layer 1-STM NRST" (solid, pour order 70): 50.487,9.636 50.614,9.763 50.614,12.049 43.629,12.049 42.452,13.226 42.452,13.592 42.099,13.592 40.557,12.049 38.719,12.049 37.279,10.609 37.279,9.636
+5V on Layer 1 "Layer 1-+5V" (solid, pour order 59): 10.738,14.478 16.98,14.478 16.98,16.119 10.112,16.119 10.112,18.714 8.36,18.714 8.36,7.261 8.382,7.239 11.811,7.239 11.811,8.001 10.287,8.001 10.287,10.287 11.811,10.287 11.811,11.049 10.287,11.049 10.16,11.176 10.16,14.097
I2C_SCL on Layer 1 "NONET_L-01_P-001" (solid, pour order 67): 43.45,25.582 43.45,25.003 43.856,23.606 44.26,25.003 44.26,25.582
CC1 on Layer 1 "NONET_L-01_P-001" (solid, pour order 57): 14.224,9.271 10.414,9.271 10.414,10.033 12.954,10.033 13.335,10.414 14.224,10.414
VBAT on Layer 1 "Layer 1-VBAT" (solid, pour order 69): 17.907,14.859 20.574,14.859 21.209,14.224 21.209,4.71 27.179,4.71 27.178,4.699 30.353,4.699 32.385,6.731 32.385,9.525 27.824,14.086 23.887,14.086 21.844,16.129 17.907,16.129
NetD4_1 on Layer 1 "NETD4_1_L01_P082" (solid, pour order 82): 36.068,28.3 37.274,28.3 38.544,27.982 38.544,27.58 36.068,27.305
V_BCKP on Layer 1 "V_BCKP_L01_P077" (solid, pour order 77): 12.065,28.194 12.192,28.067 12.192,26.289 15.367,26.289 15.748,26.67 15.748,27.813 12.954,27.813
NetR10_1 on Layer 1 "NETR10_1_L01_P080" (solid, pour order 80): 22.098,40.132 22.098,38.227 24.13,38.227 24.13,41.529 22.987,41.529
GND on Layer 4 "GND pour" (solid, pour order 89): 4.699,3.556 61.976,3.556 61.976,44.196 4.699,44.196
GND on Layer 3 "GND pour" (solid, pour order 88): 4.699,3.556 61.976,3.556 61.976,44.196 4.699,44.196
GND on Layer 2 "GND plane" (solid, pour order 74): 4.699,3.556 61.976,3.556 61.976,44.196 4.699,44.196

## Silkscreen, mask and mechanical layers (free items; w line width, h text height)
Top Overlay:
  text "Smart Bike- / Theft Tracker" at 56.007,43.18 h4 r270